# Altium PCB PCB.PcbDoc
Units mm, origin at the board's own origin, x right, y up, seen from the top; angles counter-clockwise.
Board outline 35 x 35 mm, 4 copper layers (Top Layer, GND, 3,3V, Bottom Layer), stack 0.685 mm thick; 59 components, 44 nets, 201 pads, 244 vias.
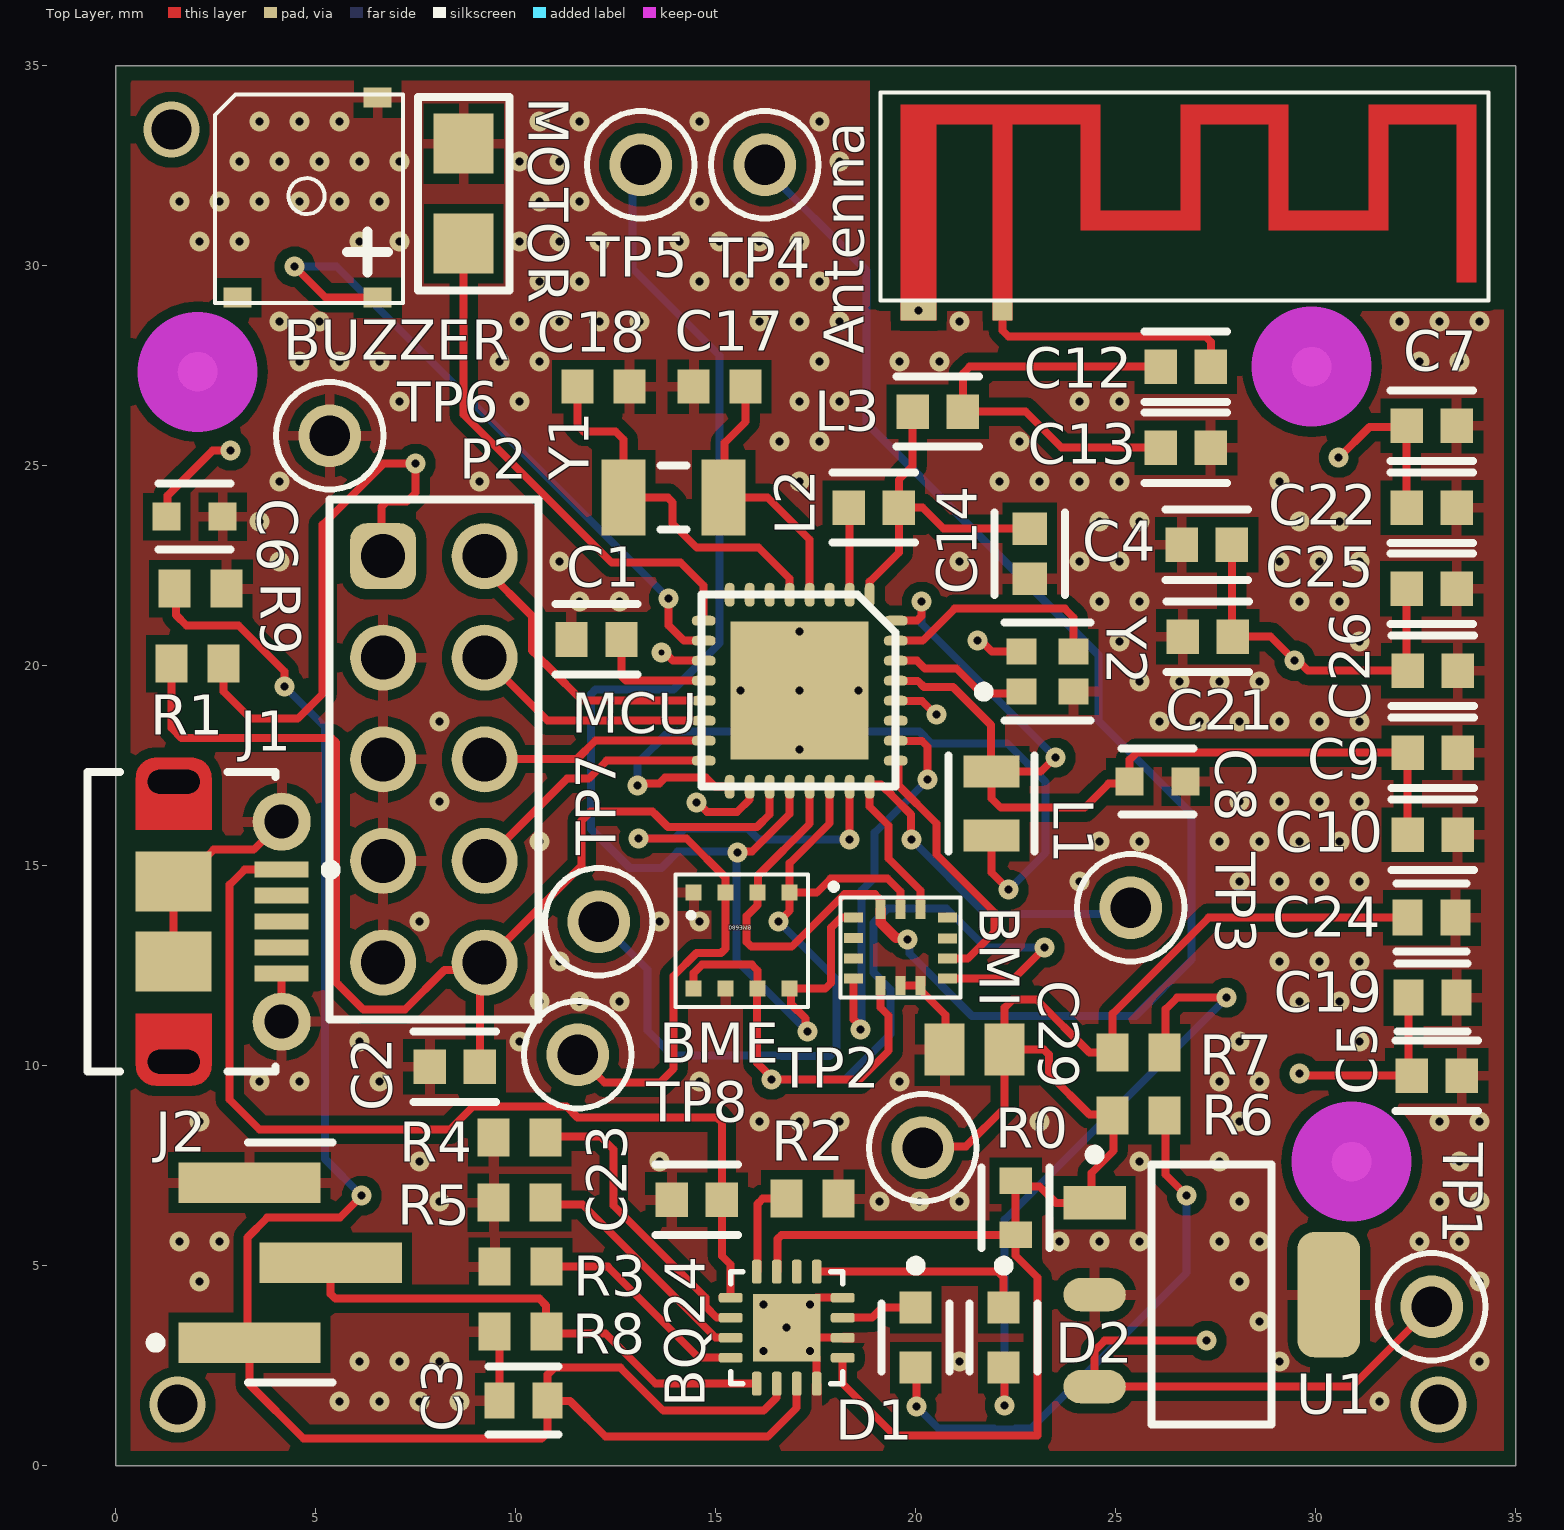
[diagram p0: Top Layer view]
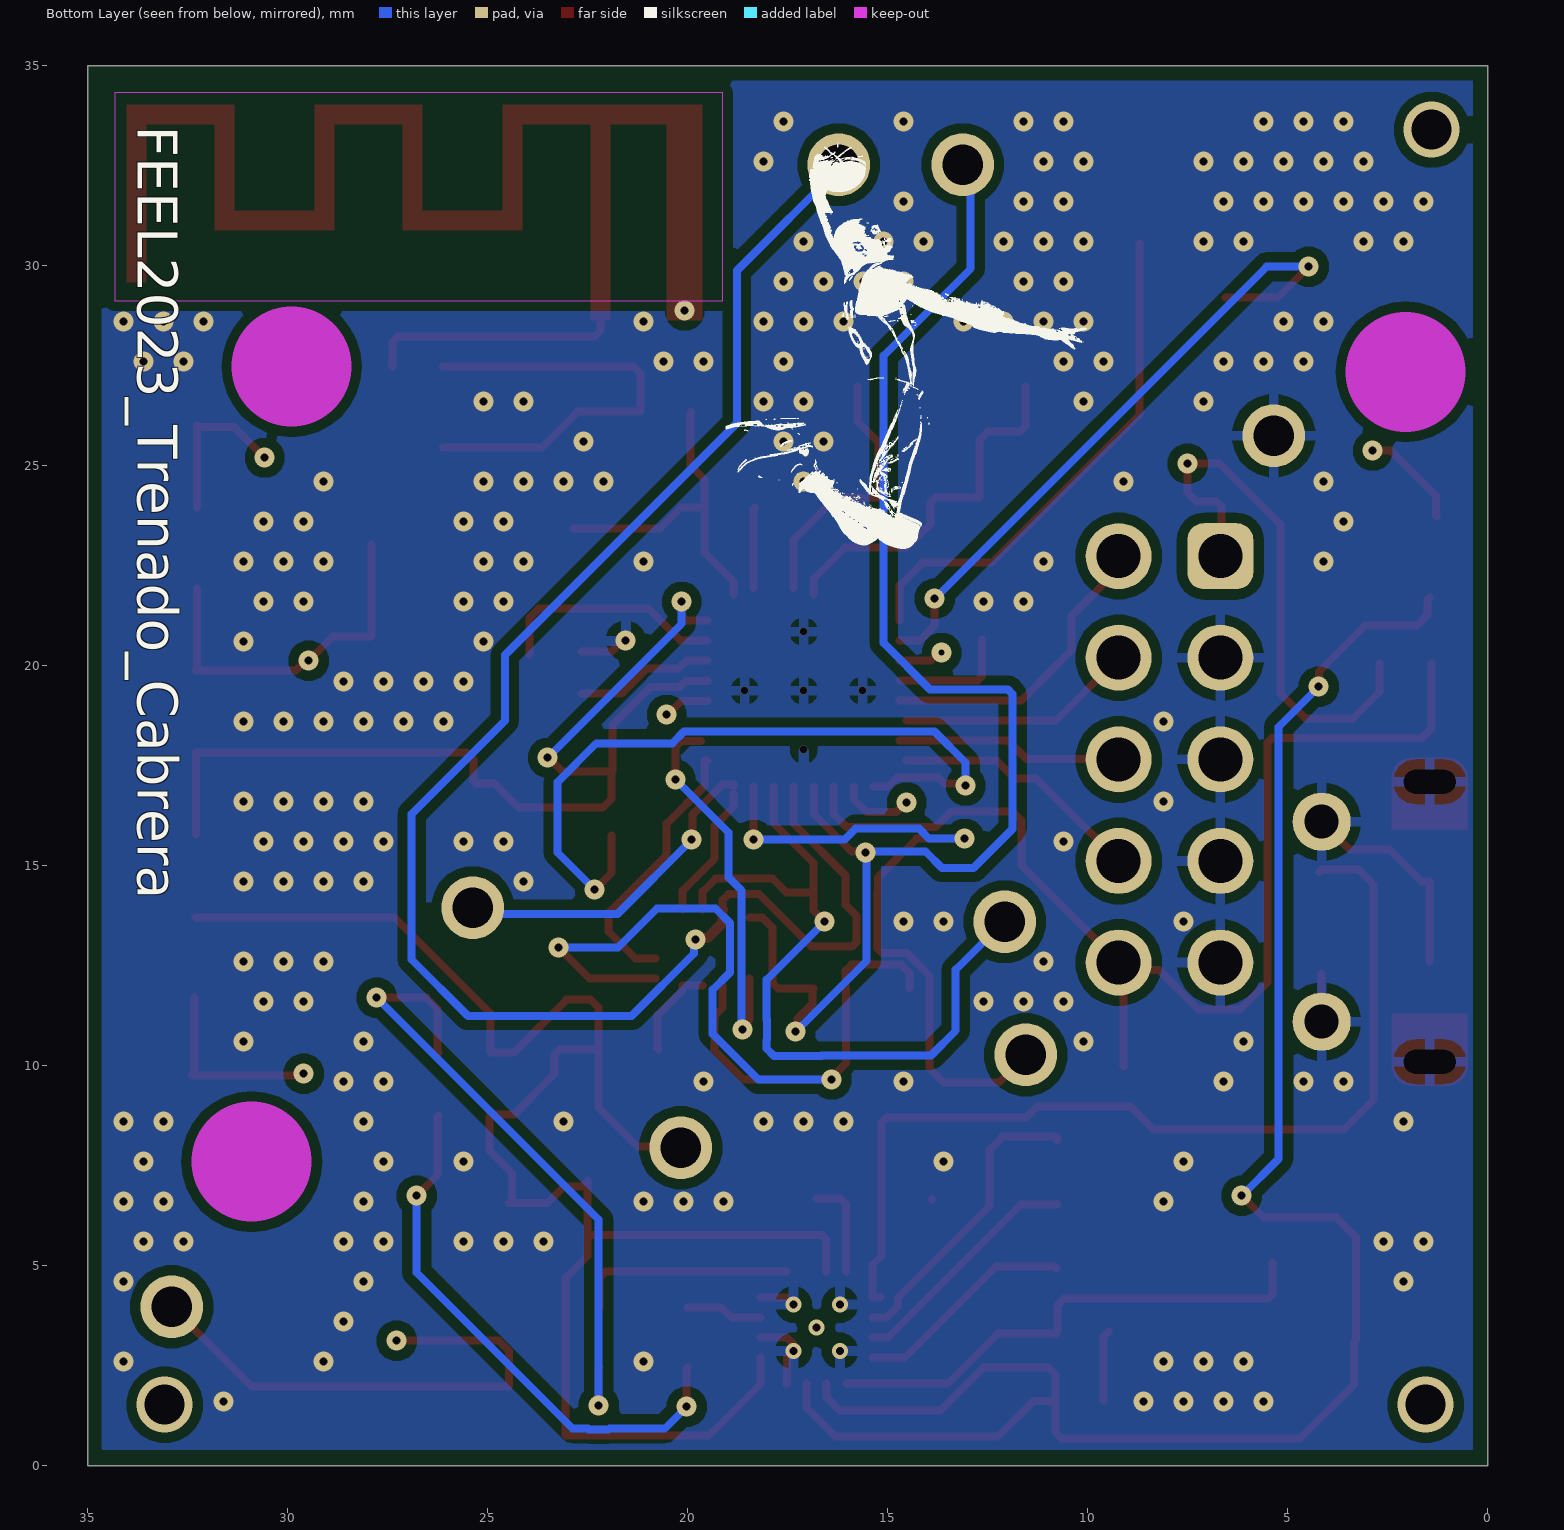
[diagram p1: Bottom Layer view, seen from below]
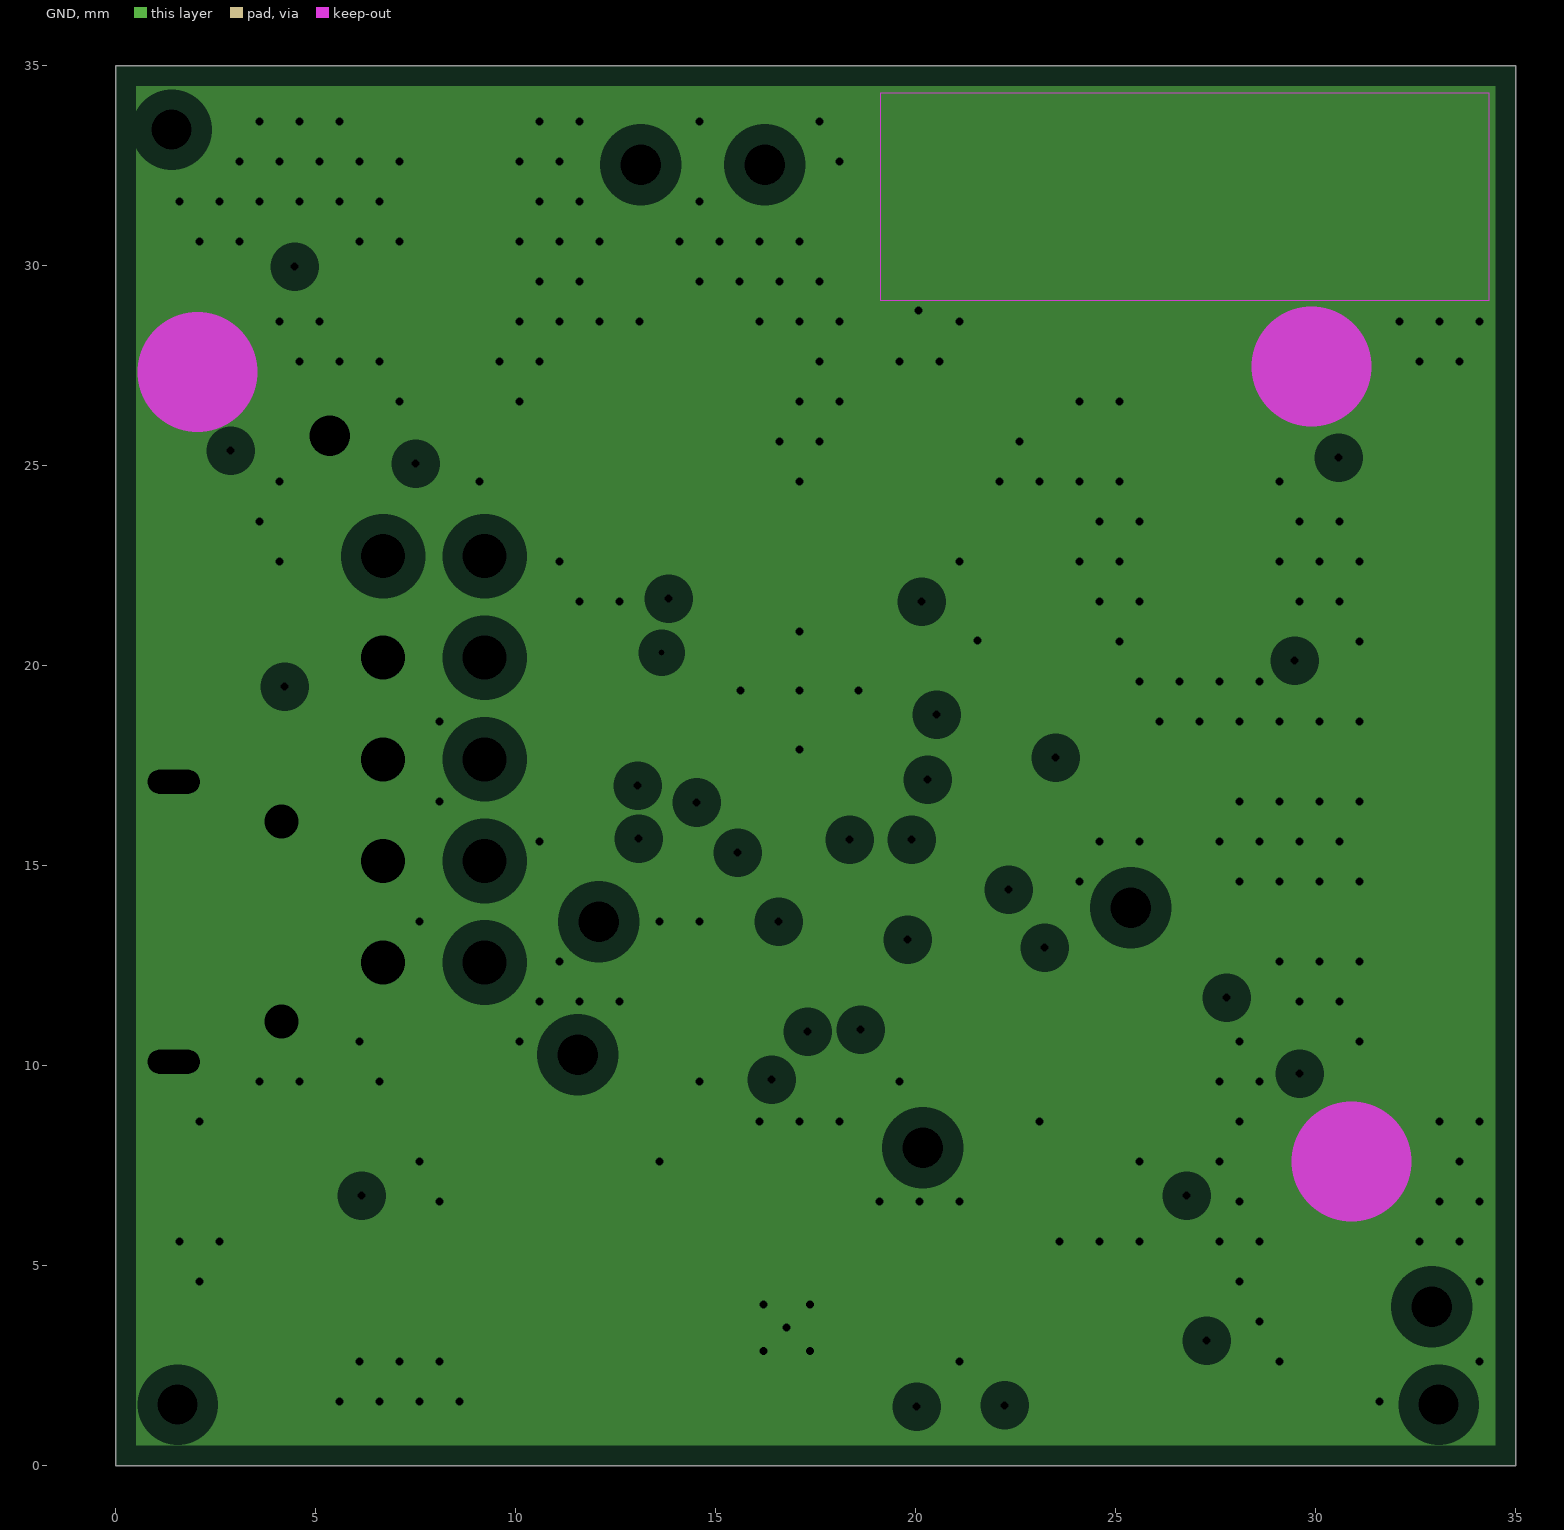
[diagram p2: GND, clearances drawn from the general rule]
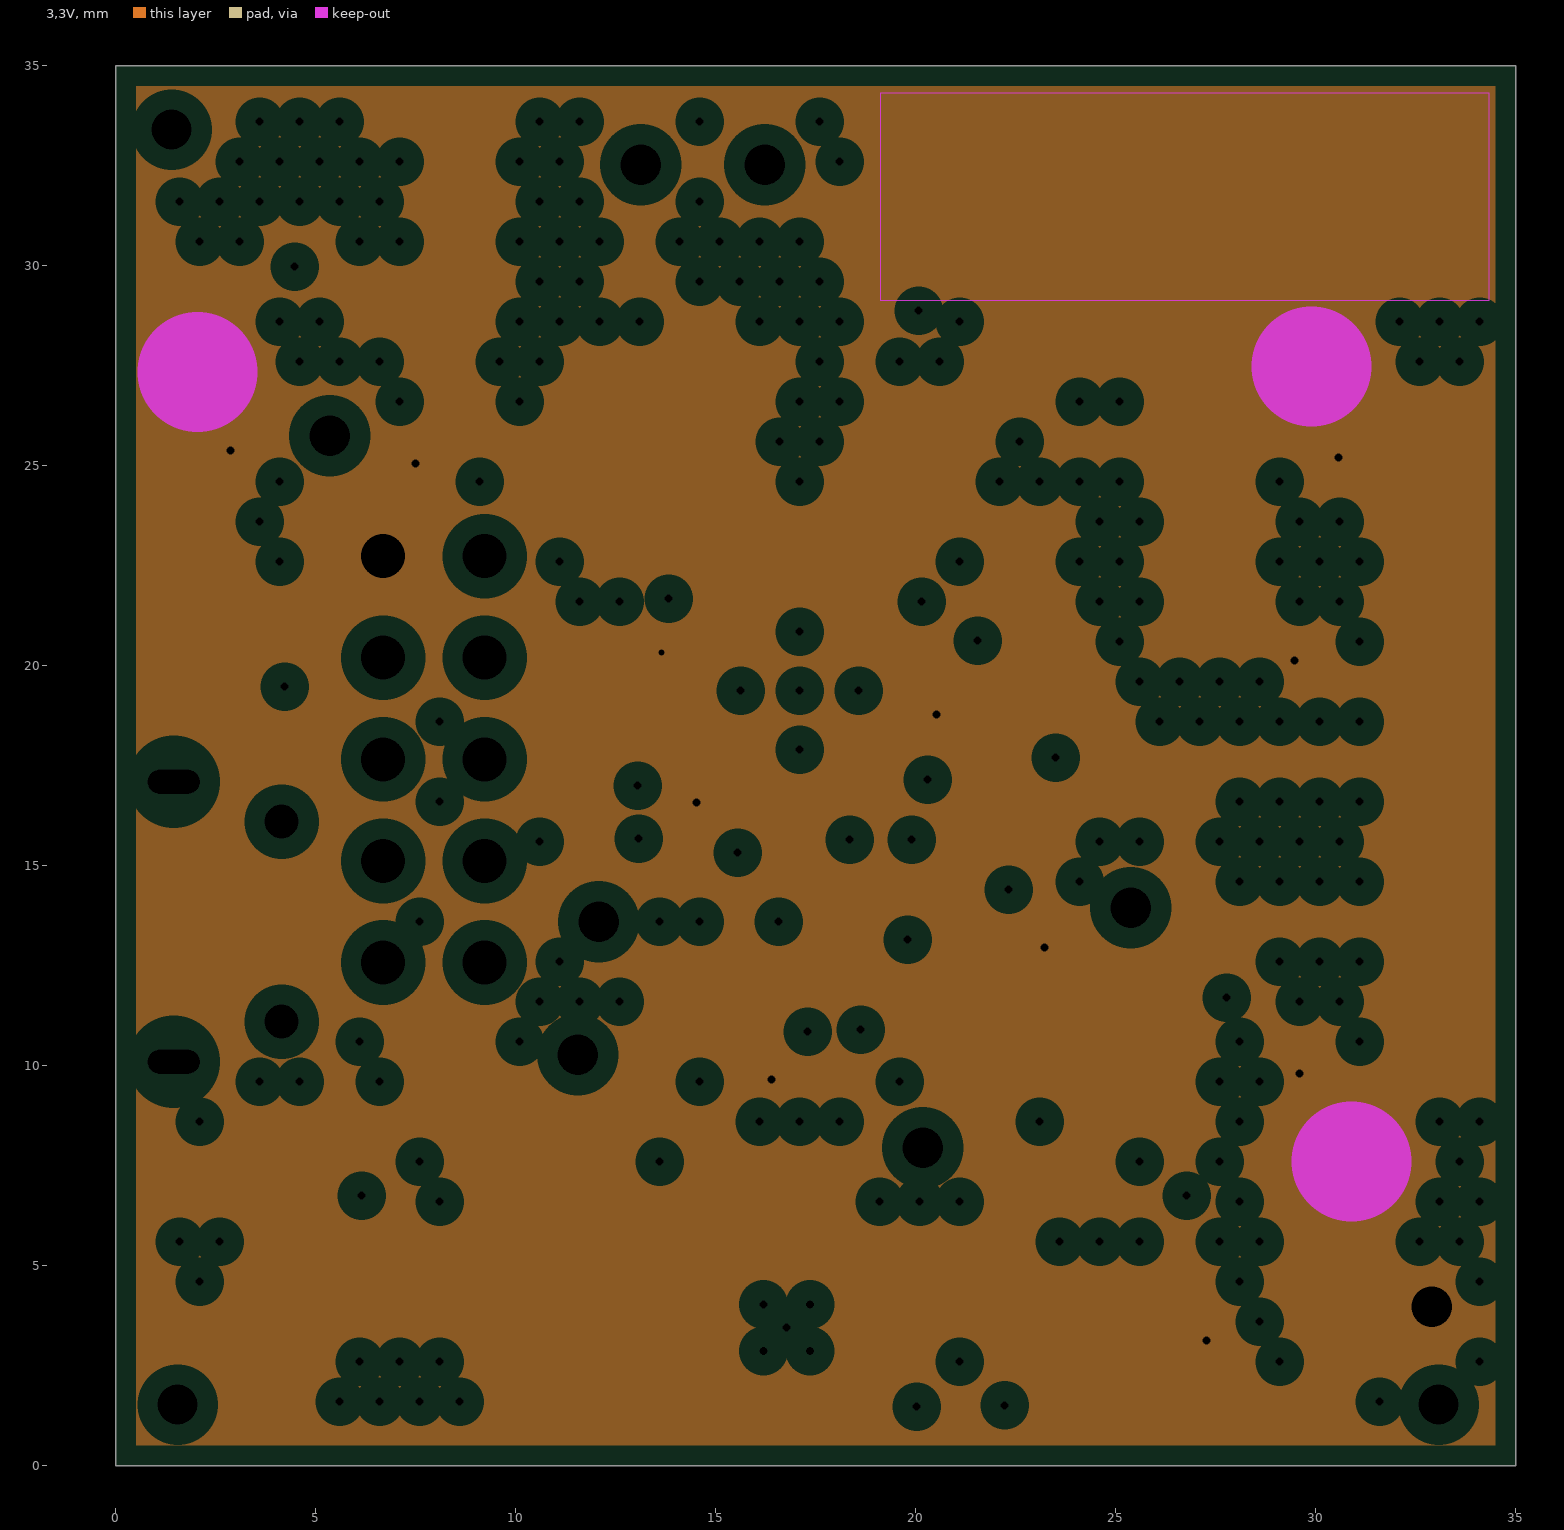
[diagram p3: 3,3V, clearances drawn from the general rule]
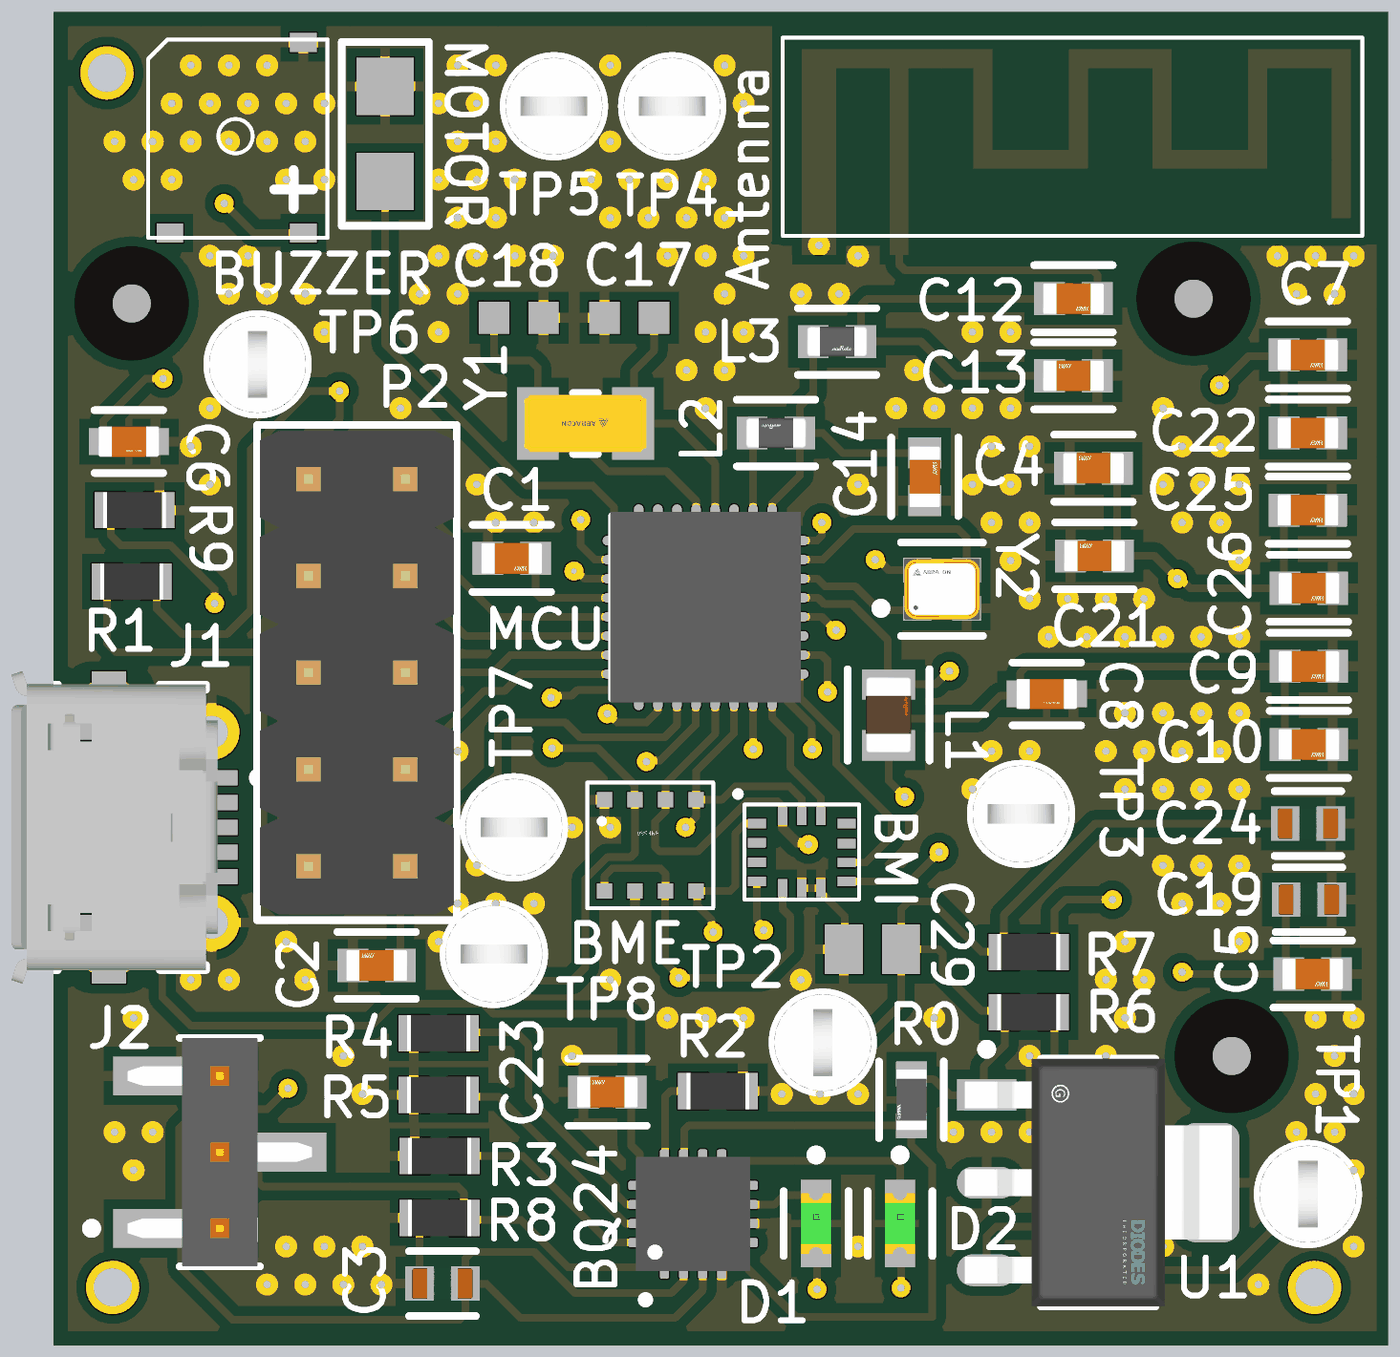
[diagram p4: 3D render of the assembled board from above, using the file's embedded part models]

## Layer stack, top to bottom
Top Solder: solder mask 0.0102, Solder Resist, Dk 3.5
Top Layer: signal copper 0.0356
Dielectric 2: prepreg 0.1118, PP-015, Dk 4.3
GND: plane copper 0.035, net CE
Dielectric 1: dielectric 0.32, FR-4, Dk 4.8
3,3V: plane copper 0.035, net 3.3V
Dielectric 5: prepreg 0.1118, PP-015, Dk 4.3
Bottom Layer: signal copper 0.0356
Bottom Solder: solder mask 0.0102, Solder Resist, Dk 3.5

## Board outline
0,0 0,35 35,35 35,0

## Design rules (kind name [scope] priority, off if disabled: settings)
AcuteAngle [All] p1: minimum=4.50000000000000E+0001 checktracksonly=FALSE
BoardOutlineClearance [All] p1: gap=0.3 ignorepadtopadclearanceinfootprint=FALSE
Clearance Clearance_1 [All] p1: gap=0.254 ignorepadtopadclearanceinfootprint=FALSE except(0: Arc-Hole Track-Hole SMDPad-Hole THPad-Hole Via-Hole Fill-Hole Poly-Hole Region-Hole Text-Hole; 0.09: Arc-Arc Arc-Track Track-Track; 0.127: SMDPad-SMDPad; 0.2: Arc-SMDPad Track-SMDPad; 0.5: Via-Via)
Clearance polygonrule [InNamedPolygon('GND_L01_P002')] p2: gap=0.254 ignorepadtopadclearanceinfootprint=FALSE except(0: Arc-Hole Track-Hole SMDPad-Hole THPad-Hole Via-Text Via-Hole Fill-Hole Poly-Hole Region-Hole Text-Hole)
HoleSize [All] p1: absolutevalues=TRUE maxlimit=6.3 minlimit=0.15 maxpercent=80.000 minpercent=20.000
MinimumAnnularRing [All] p1: minimumring=0.13
MinimumSolderMaskSliver [All] p1: minsoldermaskwidth=0.13
PlaneClearance [All] p1: clearance=0.508
PlaneConnect [All] p1: planeconnectstyle=Relief reliefexpansion=0.2 reliefentries=4 reliefconductorwidth=0.254 reliefairgap=0.254
PolygonConnect [All] p1: connectstyle=Relief reliefconductorwidth=0.254 reliefentries=4 polygonreliefangle="90 Angle" airgapwidth=0.254
RoomDefinition MCU [InComponentClass('MCU')] p1: confinementstyle=ConfineOut formatcopy=TRUE lockcomponents=FALSE outline 36.425,11.025 244.588,11.025 244.588,29.151 36.425,29.151
RoomDefinition Sensors [InComponentClass('Sensors')] p2: confinementstyle=ConfineOut formatcopy=TRUE lockcomponents=FALSE outline 31.003,47.024 64.104,47.024 64.104,53.249 31.003,53.249
RoomDefinition "Power Supply" [InComponentClass('Power Supply')] p3: confinementstyle=ConfineOut formatcopy=TRUE lockcomponents=FALSE outline 36.825,30.603 175.035,30.603 175.035,45.253 36.825,45.253
RoomDefinition Actuators [InComponentClass('Actuators')] p4: confinementstyle=ConfineOut formatcopy=TRUE lockcomponents=FALSE outline 37.8,1.426 68.03,1.426 68.03,9.952 37.8,9.952
RoutingVias [All] p1: holewidth=0.2 width=0.5 viastyle="Through Hole" minholewidth=0.15 minwidth=0.25 maxholewidth=0.7 maxwidth=0.8
SilkToSilkClearance SilkToSilkClearance_1 [IsText] p1: silktosilkclearance=0.254
SilkToSolderMaskClearance [IsText vs IsPad] p1: minsilkscreentomaskgap=0.08 clearancetoexposedcopper=FALSE
SilkToSolderMaskClearance SilkToSolderMaskClearance_1 [IsText vs SolderMaskExpansion] p2: minsilkscreentomaskgap=0 clearancetoexposedcopper=FALSE
SolderMaskExpansion [All] p1: expansion=0.038 istentingtop=FALSE soldermaskfromhole=TRUE
UnRoutedNet [IsNetTieComponent] p1:
Width [All] p1: maxlimit=0.6 minlimit=0.09 preferedwidth=0.2 minimp=50.000000 maximp=50.000000 favimp=50.000000
23 further rules are at their usual default settings.

## Classes and differential pairs
component class Sensors: BME BMI C21 C22 C25 C26
component class "Power Supply": BQ24 C3 C19 C23 C24 C29 D1 D2 J1 J2 R2 R3 R4 R5 R6 R7 R8 R9 TP1 TP2 TP6 U1
component class MCU: Antenna C1 C2 C4 C5 C6 C7 C8 C9 C10 C12 C13 C14 C17 C18 L1 L2 L3 MCU P2 R1 TP3 TP4 TP5 TP7 TP8 Y1 Y2
component class Actuators: BUZZER MOTOR

## Components (designator, comment, footprint, x,y, rotation, side; value= is the part's Value field where it differs from the comment)
Antenna "-" PCBANTENNA 19.625,28.625 r0 top locked net-tie
BME "BME680_Sen_4in1" BME_LGA8 15.65,13.125 r90 top locked
BMI "BMI323" BMI323 18.45,13.7 r0 top locked
BQ24 "BQ24232" VQFN 16.775,3.45 r90 top locked
BUZZER "Surface_Mount_Buzzer" buzzer 6.55,29.2 r90 top
C1 "1 µF" FP-0603-L_1_6_0_15-W_0_81-IPC_C 12.017,20.659 r0 top
C2 "100 nF" FP-0603-L_1_6_0_15-W_0_81-IPC_C 8.475,9.975 r180 top
C3 "4.7 µF" FP-C0603-CG-MFG 10.2,1.625 r180 top value=4.7uF
C4 "100 nF" FP-0603-L_1_6_0_15-W_0_81-IPC_C 27.275,23.025 r180 top
C5 "100 nF" FP-0603-L_1_6_0_15-W_0_81-IPC_C 33.024,9.75 r0 top
C6 "10 µF" FP-0603-L_1_6_0_2-W_0_8_0-MFG 1.975,23.725 r0 top
C7 "100 nF" FP-0603-L_1_6_0_15-W_0_81-IPC_C 32.9,26 r0 top
C8 "10 µF" FP-0603-L_1_6_0_2-W_0_8_0-MFG 26.05,17.1 r0 top
C9 "100 nF" FP-0603-L_1_6_0_15-W_0_81-IPC_C 32.925,17.825 r0 top
C10 "100 nF" FP-0603-L_1_6_0_15-W_0_81-IPC_C 32.925,15.775 r0 top
C12 "TBD" FP-0603-L_1_6_0_15-W_0_81-IPC_C 26.75,27.475 r0 top
C13 "TBD" FP-0603-L_1_6_0_15-W_0_81-IPC_C 26.749,25.45 r180 top
C14 "TBD" FP-0603-L_1_6_0_15-W_0_81-IPC_C 22.85,22.8 r90 top
C17 "12 pF" CAPC1608X73X35LL10T15 15.1,26.975 r0 top
C18 "12 pF" CAPC1608X73X35LL10T15 12.2,26.975 r180 top
C19 "4.7 µF" FP-C0603-CG-MFG 32.925,11.7 r0 top value=4.7uF
C21 "100 nF" FP-0603-L_1_6_0_15-W_0_81-IPC_C 27.3,20.725 r180 top
C22 "100 nF" FP-0603-L_1_6_0_15-W_0_81-IPC_C 32.9,23.95 r0 top
C23 "1 µF" FP-0603-L_1_6_0_15-W_0_81-IPC_C 14.525,6.65 r180 top
C24 "4.7 µF" FP-C0603-CG-MFG 32.9,13.7 r0 top value=4.7uF
C25 "100 nF" FP-0603-L_1_6_0_15-W_0_81-IPC_C 32.9,21.925 r0 top
C26 "100 nF" FP-0603-L_1_6_0_15-W_0_81-IPC_C 32.925,19.875 r0 top
C29 "1 µF" CAPC2013X135X45LL10T25 21.475,10.4 r0 top
D1 "" FP-LTST-C190GKT-MFG 20,3.2 r270 top
D2 "" FP-LTST-C190GKT-MFG 22.2,3.2 r270 top
J1 "105017-0001" USB-MICRO-B_V 2.8,13.6 r270 top locked
J2 "TMM-103-01-L-S-SM" FP-TMM-103-01-L-S-SM-MFG 4.36,5.075 r90 top
L1 "10 µH" FP-DFE201210U-MFG 21.9,16.55 r90 top locked
L2 "TBD" FP-LQM18NN_00-IPC_C 18.95,23.95 r180 top
L3 "TBD" FP-LQM18NN_00-IPC_C 20.55,26.35 r0 top
MCU "CC2640R2FRHB" CC2640 18.85,21.775 r270 top
MOTOR "MOTOR" Motor 8.7,31.8 r90 top
P2 "61301021121" 61301021121 7.955,17.66 r270 top locked
R0 "Comment" FP-AC0603-IPC_C 22.5,6.45 r270 top
R1 "1K" RESC1609X50X30NL8T20 2.05,20.05 r0 top
R2 "3.2K" RESC1609X50X30NL8T20 17.425,6.675 r180 top
R3 "1.8K" RESC1609X50X30NL8T20 10.125,4.975 r0 top
R4 "18K" RESC1609X50X30NL8T20 10.1,8.2 r0 top
R5 "3.9K" RESC1609X50X30NL8T20 10.1,6.575 r0 top
R6 "1.5K" RESC1609X50X30NL8T20 25.575,8.75 r180 top
R7 "1.5K" RESC1609X50X30NL8T20 25.575,10.325 r180 top
R8 "1K" RESC1609X50X30NL8T20 10.125,3.35 r0 top
R9 "2M" RESC1609X50X30NL8T20 2.125,21.925 r180 top
TP1 "5002" FP-5002-MFG 32.9,3.975 r90 top
TP2 "5002" FP-5002-MFG 20.175,7.95 r90 top
TP3 "5002" FP-5002-MFG 25.375,13.95 r180 top
TP4 "5002" FP-5002-MFG 16.225,32.525 r180 top
TP5 "5002" FP-5002-MFG 13.125,32.525 r180 top
TP6 "5002" FP-5002-MFG 5.35,25.75 r90 top
TP7 "5002" FP-5002-MFG 12.075,13.6 r180 top
TP8 "5002" FP-5002-MFG 11.55,10.275 r180 top
U1 "AP7361-33E-13" FP-SOT223-IPC_C 27.399,4.275 r0 top locked
Y1 "32.768KHZ" FP-ABS07-MFG 13.95,24.2 r180 top locked
Y2 "24 MHZ" FP-ABM11-MFG 23.3,19.85 r0 top locked

## Footprints (in the part's own frame and the unit in brackets; to place one, negate y for a bottom-side part, rotate by r counter-clockwise, add the part's x,y. Pads: shape width x height; smd on the part's side, far side on the other; paste and mask are expansions set on the pad)
61301021121 [mm] "Pin Header, pitch 2.54 mm, THT, Vertical, dual row, 10p"
  rrect50% 1.65x1.65 hole 1.1: 1(-5.08,-1.27)
  round 1.65 hole 1.1: 2(-5.08,1.27) 3(-2.54,-1.27) 4(-2.54,1.27) 5(0,-1.27) 6(0,1.27) 7(2.54,-1.27) 8(2.54,1.27) 9(5.08,-1.27) 10(5.08,1.27)
  silkscreen extent -6.5,-2.62 6.5,2.62, body extent -6.35,-2.54 6.35,2.54, height 8.59
BME_LGA8 [mm] "LGA, 8-Leads, Body 3,00x3,00mmx0,93mm, Pitch 0,80mm"
  rect 0.4x0.4 smd: 1(1.2,1.2) 2(1.2,0.4) 3(1.2,-0.4) 4(1.2,-1.2) 5(-1.2,-1.2) 6(-1.2,-0.4) 7(-1.2,0.4) 8(-1.2,1.2)
  silkscreen extent -1.65,-1.65 1.65,1.65, body extent -1.7,-1.7 1.7,1.7, height 1.2
BMI323 [mm]
  rect 0.475x0.25 smd: 1(0,0) 2(0,-0.508) 3(0,-1.016) 4(0,-1.524) 8(2.35,-1.525) 9(2.35,-1.025) 10(2.35,-0.525) 11(2.35,0)
  rect 0.25x0.475 smd: 5(0.675,-1.7) 6(1.175,-1.7) 7(1.675,-1.7) 12(1.675,0.2) 13(1.175,0.2) 14(0.675,0.2)
  silkscreen extent -0.52,-2 2.68,0.8, body extent -0.33,-2 2.68,0.5, height 0.25
buzzer [mm]
  rect 0.5x0.7 smd: 1(0,0) 2(5,0) 3(0,3.5)
  silkscreen extent -0.13,-0.64 5.08,4.06, body extent -0.13,-0.64 5.08,4.06, height 2
CAPC1608X73X35LL10T15 [mm] "Chip Capacitor, 2-Leads, Body 1.60x0.81mm, IPC High Density"
  rect 0.8x0.85 smd: 1(-0.65,0) 2(0.65,0)
  body extent -0.85,-0.46 0.85,0.46, height 0.73
CAPC2013X135X45LL10T25 [mm] "Chip Capacitor, 2-Leads, Body 2.00x1.25mm, IPC High Density"
  rect 1x1.3 smd: 1(-0.75,0) 2(0.75,0)
  body extent -1.05,-0.67 1.05,0.68, height 1.35
CC2640 [mm]
  oval 0.6x0.25 smd: 1(0,0) 2(0,-0.5) 3(0,-1) 4(0,-1.5) 5(0,-2) 6(0,-2.5) 7(0,-3) 8(0,-3.5) 17(4.8,-3.5) 18(4.8,-3) 19(4.8,-2.5) 20(4.8,-2) 21(4.8,-1.5) 22(4.8,-1) 23(4.8,-0.5) 24(4.8,0)
  oval 0.25x0.6 smd: 9(0.65,-4.15) 10(1.15,-4.15) 11(1.65,-4.15) 12(2.15,-4.15) 13(2.65,-4.15) 14(3.15,-4.15) 15(3.65,-4.15) 16(4.15,-4.15) 25(4.15,0.65) 26(3.65,0.65) 27(3.15,0.65) 28(2.65,0.65) 29(2.15,0.65) 30(1.65,0.65) 31(1.15,0.65) 32(0.65,0.65)
  rect 3.45x3.45 smd: 33(2.4,-1.75)
  silkscreen extent 0,-4.2 4.8,0.65, body extent -0.1,-4.25 4.9,0.75, height 1
FP-0603-L_1_6_0_2-W_0_8_0-MFG [mm]
  rect 0.7x0.7 smd paste+0 mask+0: 1(-0.7,0) 2(0.7,0)
  silkscreen extent -0.9,-0.82 0.9,0.82, body extent -1.15,-0.6 1.15,0.6, height 0.25
FP-0603-L_1_6_0_15-W_0_81-IPC_C [mm]
  rect 0.807x0.868 smd paste+0 mask+0: 1(-0.626,0) 2(0.626,0)
  silkscreen extent -1.03,-0.88 1.03,0.88, body extent -1.13,-0.58 1.13,0.58, height 0.25
FP-5002-MFG [mm]
  round 1.57 hole 1.02 paste-1000 mask+0: 1(0,0)
  silkscreen extent -1.34,-1.35 1.34,1.35, body extent -1.45,-1.45 1.45,1.45, height 0.25
FP-ABM11-MFG [mm]
  rect 0.75x0.65 smd paste+0 mask+0: 1(-0.65,-0.5) 2(0.65,-0.5) 3(0.65,0.5) 4(-0.65,0.5)
  silkscreen extent -1.72,-1.22 1.07,1.22, body extent -1.17,-0.97 1.17,0.97, height 0.25
FP-ABS07-MFG [mm]
  rect 1.1x1.9 smd paste+0 mask+0: 1(-1.25,0) 2(1.25,0)
  silkscreen extent -0.33,-0.8 0.33,0.8, body extent -1.9,-1.05 1.9,1.05, height 0.25
FP-AC0603-IPC_C [mm]
  rect 0.659x0.812 smd paste+0 mask+0: 1(-0.677,0) 2(0.677,0)
  silkscreen extent -1.01,-0.85 1.01,0.85, body extent -1.11,-0.55 1.11,0.55, height 0.25
FP-C0603-CG-MFG [mm]
  rect 0.75x0.9 smd paste+0 mask+0: 1(-0.6,0) 2(0.6,0)
  silkscreen extent -0.87,-0.85 0.87,0.85, body extent -1.2,-0.6 1.2,0.6, height 0.25
FP-DFE201210U-MFG [mm]
  rect 0.8x1.4 smd paste+0 mask+0: 1(-0.8,0) 2(0.8,0)
  silkscreen extent -1.2,-1.07 1.2,1.07, body extent -1.3,-0.8 1.3,0.8, height 0.25
FP-LQM18NN_00-IPC_C [mm]
  rect 0.807x0.858 smd paste+0 mask+0: 1(-0.626,0) 2(0.626,0)
  silkscreen extent -1.03,-0.87 1.03,0.87, body extent -1.13,-0.58 1.13,0.58, height 0.25
FP-LTST-C190GKT-MFG [mm]
  rect 0.8x0.8 smd paste+0 mask+0: 1(-0.75,0) 2(0.75,0)
  silkscreen extent -1.92,-0.85 0.85,0.85, body extent -1.25,-0.55 1.25,0.55, height 0.25
FP-SOT223-IPC_C [mm]
  rect 1.56x0.832 smd paste+0 mask+0: 1(-2.926,2.3)
  rrect100% 1.56x0.832 smd paste+0 mask+0: 2(-2.926,0) 3(-2.926,-2.3)
  rrect53% 1.56x3.132 smd paste+0 mask+0: 4(2.926,0)
  silkscreen extent -3.05,-3.25 1.5,3.62, body extent -3.81,-3.35 3.81,3.35, height 0.25
FP-TMM-103-01-L-S-SM-MFG [mm]
  rect 1.02x3.56 smd paste+0 mask+0: 1(-2,1.015) 2(0,-1.015) 3(2,1.015)
  silkscreen extent -3,-1.05 3,3.49, body extent -3.1,-2.89 3.1,2.89, height 0.25
Motor [mm]
  rect 1.5x1.5 smd: 1(-1.25,0) "2 +"(1.25,0)
  silkscreen extent -2.41,-1.14 2.41,1.14
PCBANTENNA [mm]
  rect 0.5x0.5 smd paste-0.25 mask+0: 1(2.55,0.25)
  rect 0.9x0.5 smd paste-0.45 mask+0: 2(0.45,0.25)
  Top Layer region: 0,4.9 5,4.9 5,5.4 0,5.4
  Top Layer region: 4.5,2.26 5,2.26 5,4.953 4.5,4.953
  Top Layer region: 4.953,2.26 7.112,2.26 7.112,2.76 4.953,2.76
  Top Layer region: 7,2.26 7.5,2.26 7.5,4.953 7,4.953
  Top Layer region: 7,4.9 9.7,4.9 9.7,5.4 7,5.4
  Top Layer region: 9.2,2.26 9.7,2.26 9.7,4.953 9.2,4.953
  Top Layer region: 9.652,2.26 11.811,2.26 11.811,2.76 9.652,2.76
  Top Layer region: 11.7,2.26 12.2,2.26 12.2,4.953 11.7,4.953
  Top Layer region: 11.7,4.9 14.4,4.9 14.4,5.4 11.7,5.4
  Top Layer region: 13.9,0.96 14.4,0.96 14.4,4.953 13.9,4.953
  Top Layer region: 2.3,0 2.8,0 2.8,4.953 2.3,4.953
  Top Layer region: 0,0 0.9,0 0.9,4.953 0,4.953
  Keep-Out Layer region: -0.5,0.5 -0.5,5.7 14.7,5.7 14.7,0.5
  silkscreen extent -0.5,0.5 14.7,5.7
RESC1609X50X30NL8T20 [mm] "Chip Resistor, 2-Leads, Body 1.65x0.95mm, IPC Medium Density"
  rect 0.8x0.95 smd: 1(-0.65,0) 2(0.65,0)
  body extent -0.82,-0.48 0.82,0.48, height 0.5
USB-MICRO-B_V [mm] "USB, MICRO B, Body 7.491x4.695 mm, Pitch 0.65 mm"
  rect 0.4x1.35 smd: 1(-1.3,1.35) 2(-0.65,1.35) 3(0,1.35) 4(0.65,1.35) 5(1.3,1.35)
  round 1.45 hole 0.85: 6(-2.5,1.35) 7(2.5,1.35)
  rrect50% 0x0 hole 0.6 slot 1.3 at 90 deg: 8(-3.5,-1.35)
  rect 1.5x1.9 smd: 9(-1,-1.35) 10(1,-1.35)
  rrect50% 0x1 hole 0.6 slot 1.3 at 90 deg: 11(3.5,-1.35)
  Top Layer circle w0.5: c-3.6,-0.9 r0.25
  Top Layer circle w0.5: c3.6,-0.9 r0.25
  Top Layer circle w0.5: c-3.6,-1.8 r0.25
  Top Layer circle w0.5: c3.6,-1.8 r0.25
  Top Layer region: -3.6,-1.8 -3.6,-0.9 -4.1,-0.9 -4.1,-1.8
  Top Layer region: -2.3,-2.3 -2.3,-0.4 -3.6,-0.4 -3.6,-2.3
  Top Layer region: 2.3,-0.4 2.3,-2.3 3.6,-2.3 3.6,-0.4
  Top Layer region: 3.6,-0.9 3.6,-1.8 4.1,-1.8 4.1,-0.9
  silkscreen extent -3.75,-3.5 3.75,2.7, body extent -4.1,-3.9 4.1,1.5, height 2.67
VQFN [mm]
  rrect50% 0.6x0.24 smd: 1(-1.4,0.75) 2(-1.4,0.25) 3(-1.4,-0.25) 4(-1.4,-0.75) 9(1.4,-0.75) 10(1.4,-0.25) 11(1.4,0.25) 12(1.4,0.75)
  rrect50% 0.24x0.6 smd: 5(-0.75,-1.4) 6(-0.25,-1.4) 7(0.25,-1.4) 8(0.75,-1.4) 13(0.75,1.4) 14(0.25,1.4) 15(-0.25,1.4) 16(-0.75,1.4)
  rect 1.68x1.68 smd: 6(0,0)
  round 0.4 on Top Overlay: ""(-2.25,1.25)
  silkscreen extent -1.4,-1.4 1.4,1.4, body extent -1.5,-1.5 1.5,1.5, height 1

## Part data
Antenna: library part PCBAntenna, "GND pin has a via to a GND plane that is not included in the footprint, but has to be included in the final PCB layout design."
C1 C12 C13 C14 C23: library part CMP-2006-04569-2, "General Purpose Ceramic Capacitor, 0603, 1uF, +80/-20 %, Y5V, +22%/ –82%, 10V", Capacitance=1uF, Case Code=0603, Case Code (Metric)=1608, Dielectric=Y5V, Insulation Resistance=100GR, Max Operating Temperature=85°C, Min Operating Temperature=-30°C, Package Quantity=1, Tolerance=80%, Voltage=10V, Case Code (Imperial)=0603, Case/Package=0603, Construction=Flat, Contact Plating=Tin, Depth=0.81mm, Dissipation Factor=12.5%, Height=0.63mm, Lead Free="Lead Free", Length=1.6mm, Mount="Surface Mount", Number of Pins=2, Packaging="Tape and Reel", Radiation Hardening=No, REACH SVHC="No SVHC", RoHS Compliant=Yes, Series=-, Termination=SMD/SMT, Thickness=0.035inch, Voltage Rating=10V, Voltage Rating (DC)=10V, Width=0.032inch
C2 C4 C5 C7 C9 C10 C21 C22 C25 C26: library part CMP-2006-04386-2, "Automotive Ceramic Capacitor, 0603, 100nF, 10%, X7R, 15%, 50V", Capacitance=100nF, Case Code (Imperial)=0603, Case Code (Metric)=1608, Dielectric=X7R, Dielectric Material=Ceramic, Insulation Resistance=100GR, Max Operating Temperature=125°C, Min Operating Temperature=-55°C, Package Quantity=1, Ratings=AEC-Q200, Tolerance=10%, Voltage=50V, Case/Package=0603, Construction=Flat, Contact Plating=Tin, Depth=0.81mm, Dissipation Factor=2.5%, Height=0.9mm, Lead Free="Lead Free", Length=1.6mm, Mount="Surface Mount", Number of Pins=2, Packaging="Tape and Reel", Radiation Hardening=No, REACH SVHC="No SVHC", RoHS Compliant=Yes, Series=-, Termination=SMD/SMT, Thickness=0.035inch, Voltage Rating=50V, Voltage Rating (DC)=50V, Width=0.032inch
C3 C19 C24: library part CMP-2006-02256-2, "CAP CER 4.7UF 6.3V X5R 0603", Capacitance=4.7uF, Manufacturer=Kemet, Manufacturer Part Number=C0603C475K9PACTU, Package=C0603-CG, Temperature="-55°C to +85°C", Temperature Characteristic=X5R, Temperature Coefficient=15%, Temperature Range High=+85°C, Temperature Range Low=-55°C, Tolerance=10%, Voltage Rating=6.3V, Automotive=No, Category=Cap, ComponentLink2Description=Datasheet, ComponentLink2URL=https://content.kemet.com/datasheets/KEM_C1006_X5R_SMD.pdf, Device Class L1="Passive Components", Device Class L2=Capacitors, Device Class L3="Ceramic Capacitors", Digikey Description="CAP CER 4.7UF 6.3V X5R 0603", Height=0.9mm, Ipc Land Pattern Name=CAPC16080X80, Lead Free=Yes, Material=Ceramic, Mouser Description="Multilayer Ceramic Capacitors MLCC - SMD/SMT 6.3volts 4.7uF X5R 10%", Octopart=https://octopart.com/c0603c475k9pactu-kemet-104242, RoHS=TRUE
C6 C8: library part CMP-2000-06226-4, "Multilayer Ceramic Capacitor 10uF 16V X5R 20% SMD 0603 T/R", Capacitance=10uF, Case Code (Imperial)=0603, Case Code (Metric)=1608, Dielectric=X5R, Max Operating Temperature=85°C, Min Operating Temperature=-55°C, Package Quantity=1, Tolerance=20%, Voltage Rating=16V, Case/Package=0603, Construction=Flat, Halogen Free="Halogen Free", Height=0.8mm, Length=0.063inch, Mount="Surface Mount", Packaging="Tape and Reel", RoHS Compliant=Yes, Series=M, Termination=SMD/SMT, Thickness=0.031inch, Voltage Rating (DC)=16V, Width=0.031inch
C17 C18: library part CMP-2006-04614-1, Manufacturer="AVX Interconnect / Elco", Part Number=06035J120GBSTR
C29: library part CMP-1036-04761-2, Manufacturer=Murata, Part Number=GRM21BR71H105KA12L
D1 D2: library part CMP-22017-000005-2, "LED GREEN CLEAR CHIP SMD", Case Code (Imperial)=0603, Case Code (Metric)=1608, Color=Green, Forward Current=30mA, Forward Voltage=2.1V, Lens Color=Colorless, Max Operating Temperature=85°C, Min Operating Temperature=-55°C, Package Quantity=1, Power Dissipation=100mW, Reverse Voltage=5V, Test Current=10mA, Voltage=2V, Case/Package=0603, Depth=0.8mm, Dominant Wavelength=569nm, Height=0.8mm, Illumination Color=Green, Lead Free="Lead Free", Length=1.6mm, Lens Style=Clear, Lens Transparency=Clear, Luminous Intensity=6mcd, Mount="Surface Mount", Number of Elements=1, Number of LEDs=1, Number of Pins=2, Packaging="Tape and Reel", Power Rating=100mW, Radiation Hardening=No, Viewing Angle=130°, Wavelength=565nm, Width=0.8mm
J1: library part CMP-2000-05827-1, "Micro-USB B Receptacle, Right Angle, Bottom Mount, Surface Mount, with Solder Tabs, -30 to 85 degC, 5-Pin USB, RoHS, Tape and Reel", Manufacturer=Molex, Package Description="5-Leads USB, Micro B, Body 7.5 x 5 mm, Pitch 0.65 mm", Package Reference=MICRO-B, Package Version="Rev. F, 12/2012", Standard Package=1, Voltage - Max=30V, 3D Model=105017-0001.stp, Catalog Drawings=1050170001, Category=Connectors,Interconnects, Circuits=5, Connector Type=USB-microB, Datasheet URL=http://www.molex.com/elqNow/elqRedir.htm?ref=http://www.molex.com/webdocs/datasheets/pdf/en-us/1050170001_IO_CONNECTORS.pdf, Datasheet Version=03/2016, Family=USB,DVI,HDMIConnectors, Featured Product=Micro-USBConnectorsUSBConnectors, Features=Shielded,SolderRetention, Gender=Receptacle, Ingress Protection=-, Manufacturer URL=http://www.molex.com/, Mating Products=WM17145-ND-CABLEMICROUSBBTOSTDA1.0MWM17147-ND-CABLEMICROUSBBTOSTDA2.0MWM17146-ND-CABLEMICROUSBBTOSTDA1.5M, Mounting Technology=SurfaceMount, Mounting Type=BoardCutout,SurfaceMount,RightAngle, Number of Contacts=5, Online Catalog=Molex-MicroUSB, Other Names=WM1399DKR, Package URL=http://www.molex.com/pdm_docs/sd/1050170001_sd.pdf, Packaging=Digi-Reel®, PCN Assembly/Origin=ResinSupplier21/Oct/2015, RoHS Information=1050170001CertofCompliance, Series=-, Specifications=-
J2: library part CMP-02766-001735-1, "CONN HEADER SMD 3POS 2MM", Flammability Rating="UL94 V-0", Housing Color=Black, Max Current Rating=3.9A, Max Operating Temperature=125°C, Max Voltage Rating (AC)=500V, Min Operating Temperature=-55°C, Connector Type=Header, Contact Finish - Mating=GOLD, Contact Material=Bronze, Contact Plating=Gold, Contact Shape=Square, Contact Type="Male Pin", Depth=1.97mm, Fastening Type=Pull, Gender=Male, Housing Material=Polymer, Insulation Color=Black, Insulation Material=Polymer, Lead Free="Lead Free", Length=6mm, Number of Contacts=3, Number of Positions=3, Number of Rows=1, Orientation=Straight, Packaging=Bulk, Pitch=2mm, Radiation Hardening=No, REACH SVHC="No SVHC", RoHS Compliant=Yes, Series=TMM, Termination=Solder
L1: library part CMP-06042-016271-1, "FIXED IND 2.2UH 1.2A 228 MOHM", RoHS Compliant=Yes
L2 L3: library part CMP-06042-016946-1, "Multilayer Type Inductor for General Circuits, 0603 (1608), 180nH, 10%, 0.6Ω, 50mA", Case Code (Imperial)=0603, Case Code (Metric)=1608, Current Rating=50mA, DC Resistance (DCR)=600mR, Inductance=180nH, Inductance Tolerance=10%, Inductor Type=MONOLITHIC, Max Operating Temperature=85°C, Min Operating Temperature=-40°C, Package Quantity=4000, Self Resonant Frequency=165MHz, Test Frequency=25MHz, Case/Package=0603, Core Material=Ferrite, DC Current=50mA, Depth=0.95mm, Height=0.8mm, Height - Seated (Max)=0.035inch, Length=1.6mm, Max DC Current=50mA, Military Standard=Not, Mount="Surface Mount", Number of Pins=2, Packaging="Tape and Reel", Q Factor=15, REACH SVHC="No SVHC", RoHS Compliant=Yes, Series=LQM18N, Shielding=Shielded, Termination=SMD/SMT, Tolerance=10%, Width=0.031inch
P2: library part CMP-1502-01084-2, Color=Black, Contact Resistance=20mΩ, Current Rating=3A, Flammability Rating="UL94 V-0", Insulation Resistance=1GΩ, Max Operating Temperature=105°C, Min Operating Temperature=-40°C, Operating Supply Voltage=250V, Connector Type="Male Pin", Contact Gender=Male, Contact Material=Copper, Contact Mating Length=5.9944mm, Contact Plating=Gold, Gender=Male, Height=2.54mm, Housing Material=PBT, Insulation=Insulated, Lead Pitch=2.54mm, Length=12.7mm, Mount="Through Hole", NexarPartId=18818163, Number of Contacts=10, Number of Pins=10, Number of Positions=10, Number of Rows=2, Orientation=Vertical, Packaging=Bulk, Pitch=2.54mm, REACH SVHC=Unknown, RoHS=Compliant, Row Spacing=2.54mm, Termination="Through Hole", Voltage Rating=250V, Width=12.7mm
R1 R2 R3 R4 R5 R6 R7 R8 R9: library part CMP-2000-03816-5, "Chip Resistor, 0 Ohm, Jumper, 100 mW, -55 to 155 degC, 0603 (1608 Metric), RoHS, Tape and Reel", Manufacturer="Vishay Semiconductor", Max Operating Temperature="155 degC", Min Operating Temperature="-55 degC", Package Quantity=5000, Voltage Rating="75 V", ComponentLink1Description="Manufacturer URL", ComponentLink1URL=http://www.vishay.com/, ComponentLink2Description=Datasheet, ComponentLink2URL=http://www.vishay.com/docs/20035/dcrcwe3.pdf, DatasheetVersion=06/2012, Height="0.45 mm", Length="1.55 mm", Mount="Surface Mount", Mounting Technology="Surface Mount", PackageDescription="2-Pin Surface Mount Device, Body 1.575 x 0.85 mm", PackageReference=0603, Packaging="Tape and Reel", Pins=2, REACH SVHC=Unknown, RoHSCompliant=true
TP1 TP2 TP3 TP4 TP5 TP6 TP7 TP8: library part CMP-2000-05182-2, "PC TEST POINT MINIATURE WHITE", Color=White, Flammability Rating="UL94 V-0", Package Quantity=100, Body Material=Bronze, Contact Material=Bronze, Contact Plating=Silver, Hole Diameter=1.6mm, Housing Color=White, Inside Diameter=1.27mm, Insulation=Insulated, Lead Free="Lead Free", Length=7.62mm, Material=Nylon, Mount="Through Hole", Number of Ports=1, Orientation=Straight, Outside Diameter=2.54mm, Packaging=Bulk, Plating=Silver, REACH SVHC="No SVHC", RoHS Compliant=Yes, Series=THM
U1: library part CMP-12756-000024-1, "IC REG LINEAR 3.3V 1A SOT223", Case/Package=SOT-223, Dropout Voltage=500mV, Max Input Voltage=6V, Max Operating Temperature=85°C, Max Output Current=1A, Max Power Dissipation=1.1W, Min Current Limit=1.1A, Min Input Voltage=2.2V, Min Operating Temperature=-40°C, Output Voltage=3.3V, Package Quantity=1, Power Dissipation=1.1kW, Power Supply Rejection Ratio (PSRR)=65dB, Quiescent Current=70uA, Reference Voltage=800mV, Accuracy=1%, Contact Plating=Tin, Lead Free="Lead Free", Mount="Surface Mount", Number of Outputs=1, Number of Pins=4, Number of Regulators=1, Output Current=1A, Output Type=Fixed, Packaging="Tape and Reel", Polarity=Positive, Radiation Hardening=No, REACH SVHC="No SVHC", Weight=0.000282oz
Y1: library part CMP-0447-00001-4, "Crystal 32.768kHz ±20ppm (Tol) 12.5pF FUND 70kΩ 2-Pin CSMD T/R", Case/Package=CSMD, ESR (Equivalent Series Resistance)=70kR, Frequency=32.768kHz, Frequency Tolerance=20ppm, Load Capacitance=12.5pF, Max Operating Temperature=85°C, Min Operating Temperature=-40°C, Operating Frequency="32.768 kHz", Package Quantity=3000, Depth=1.5mm, Height=0.9mm, Lead Free="Lead Free", Length=3.2mm, Number of Pins=2, Packaging="Tape and Reel", Radiation Hardening=No, REACH SVHC="No SVHC", RoHS Compliant=Yes, Series=ABS07, Series Resistance=70kR, Termination=SMD/SMT, Tolerance=20ppm, Width=1.5mm
Y2: library part CMP-27762-002563-1, "Crystal 24MHz ±20ppm 10pF SMD-4 2mm x 1.6mm", Case/Package=CSMD, ESR (Equivalent Series Resistance)=100R, Frequency=24MHz, Frequency Stability=20ppm, Load Capacitance=10pF, Max Operating Temperature=85°C, Min Operating Temperature=-40°C, Package Quantity=3000, Depth=1.6mm, Frequency Tolerance=20ppm, Height=0.023inch, Length=2mm, Mount="Surface Mount", Number of Pins=4, Packaging="Tape and Reel", REACH SVHC="No SVHC", RoHS Compliant=Yes, Series=ABM11, Series Resistance=100R, Termination=SMD/SMT, Tolerance=20ppm, Width=1.6mm
BMI BQ24 BUZZER MOTOR: Company="ETSI Telecomunicaciones"

## Free pads (board coordinates)
  round 1 smd mask+1: 8(2.05,27.35) 9(29.9,27.475) 10(30.9,7.6)

## Via types
v1: diameter 0.5, hole 0.2, Top Layer to Bottom Layer, 230 vias
v2: diameter 0.2, hole 0.2, Top Layer to Bottom Layer, 5 vias
v3: diameter 0.4, hole 0.2, Top Layer to Bottom Layer, 5 vias
v4: diameter 1.4, hole 1, Top Layer to Bottom Layer, 3 vias
v5: diameter 0.5, hole 0.15, Top Layer to Bottom Layer, 1 vias

## Nets (pads, with @x,y where several pads share a name; then routed paths per layer and width w, separated by ;. In a path a pad name is that pad's centre, name@x,y a point inside that pad or via, vN(x,y) a via of type N, cw(c..) or ccw(c..) an arc to the next point about the centre after c; other vN are vias at no path point)
3.3V: BME.6 BME.8 BMI.5 BMI.8 C4.1 C5.1 C6.1 C7.1 C19.1 C21.1 C22.1 C25.1 C26.1 MCU.11 MCU.18 MCU.28 P2.1 R1.2 TP1.1 U1.3 | length 75.5
  Top Layer w0.2: C6.1 1.299,23.749 1.299,24.258 2.416,25.375 v1(2.875,25.375) ; R1.2 2.7,19.35 3.375,18.675 4.55,18.675 5.175,19.3 5.175,23.525 6.7,25.05 v1(7.5,25.05) 7.5,24.325 7.275,24.1 6.775,24.1 6.65,23.975 6.65,22.775 P2.1 P2.1@6.685,22.767 ; v5(13.65,20.325) 13.731,20.325 13.931,20.125 MCU.11 ; BME.8 14.45,12.315 14.66,12.525 15.901,12.525 16.05,12.376 BME.6 16.037,11.913 16.037,10.065 16.4,9.703 v1(16.4,9.65) 18.6,9.65 19.325,10.375 19.325,11.25 19.125,11.45 BMI.5 ; v1(14.525,16.581) 14.551,16.581 14.784,16.348 15.537,16.348 15.848,16.659 15.848,16.973 MCU.18 ; MCU.28 19.502,19.123 20.151,19.123 20.499,18.775 v1(20.525,18.775) ; BMI.8 22.45,12.175 v1(23.225,12.95) ; v1(27.275,3.125) 24.725,3.125 24.473,2.873 U1.3 30.9,1.975 TP1.1 ; C4.1 27.901,20.75 C21.1 28.875,20.725 v1(29.475,20.125) ; v1@29.556,20.125 29.806,19.875 C26.1 32.274,19.9 C25.1 ; v1(29.6,9.8) 29.65,9.75 C5.1@32.325,9.75 ; v1(30.575,25.2) 31.344,25.969 32.243,25.969 C7.1 C22.1 ; C19.1 32.325,9.823 C5.1
  Bottom Layer w0.2: v1(16.4,9.65) 18.229,9.65 19.375,10.796 19.375,11.9 18.946,12.329 18.946,13.571 19.3,13.925 20.774,13.925 21.749,12.95 v1(23.225,12.95)
4.4V: BQ24.5 BQ24.11 C24.1 C29.2 R0.1 R0.2 R6.2 R7.2 TP2.1 U1.1 | length 45.5
  Top Layer w0.2: BQ24.11 16.545,4.87 16.545,5.67 16.648,5.773 R0.2 ; BQ24.5 18.175,2.05 19.475,0.75 23.05,0.75 23.05,4.7 22.5,5.25 R0.2 ; TP2.1 20.21,7.985 21.26,7.985 22.225,8.95 C29.2 ; C24.1 27.325,13.7 24.925,11.3 R7.2 24.917,10.333 24.342,10.333 23.025,11.65 22.425,11.65 22.225,11.45 C29.2 ; C29.2 23.209,10.4 23.326,10.283 23.326,9.799 24.342,8.783 24.892,8.783 R6.2 24.95,8.725 24.95,7.875 24.4,7.325 24.4,6.648 U1.1 24.463,6.565 23.51,6.565 23.089,6.986 22.641,6.986 R0.1 R0.2
BAT1: BQ24.2 BQ24.3 C3.1 J2.1 R9.2 | length 48.4
  Top Layer w0.2: R9.2@1.452,21.7 1.508,21.644 1.508,21.267 1.775,21 3.075,21 4.224,19.851 4.224,19.476 v1(4.225,19.475) ; v1(6.15,6.75) 5.601,6.201 3.787,6.201 3.295,5.709 3.295,3.125 J2.1 3.345,2.03 4.7,0.675 10.65,0.675 10.8,0.825 C3.1 ; BQ24.2 16.525,1.703 16.197,1.375 13.689,1.375 12.614,2.45 10.975,2.45 10.8,2.275 C3.1 ; BQ24.3 17.025,1.45 16.3,0.725 12.25,0.725 11.358,1.617 10.808,1.617 C3.1
  Bottom Layer w0.2: v1(4.225,19.475) 5.226,18.474 5.226,16.55 5.229,16.547 5.229,7.671 v1(6.15,6.75)
CHG: BQ24.9 D2.1 | length 5.5
  Top Layer w0.2: BQ24.9 22.051,4.85 22.2,4.701 D2.1
CSB: BMI.12 MCU.24 TP3.1 | length 11.8
  Top Layer w0.2: MCU.24@18.85,16.802 18.85,16.475 19.325,16 19.325,15.175 20.125,14.375 BMI.12 ; MCU.24 18.85,17.025 19.133,17.025 19.22,16.945 19.375,16.79 19.882,16.282 19.882,15.668 v1(19.9,15.65)
  Bottom Layer w0.2: v1(19.9,15.65) 21.754,13.796 25.221,13.796 TP3.1
CSB2: BME.2 MCU.23 TP8.1 | length 18.1
  Top Layer w0.2: TP8.1@11.375,10.425 12.225,9.575 13.6,9.575 13.95,9.925 13.95,12.249 14.516,12.815 15.133,12.815 15.25,12.932 BME.2 15.242,14.333 15.242,14.708 14.275,15.675 v1(13.075,15.675) ; v1(18.35,15.65) MCU.23
  Bottom Layer w0.2: v1(13.075,15.675) 13.965,15.675 14.219,15.929 15.8,15.929 16.079,15.65 v1(18.35,15.65)
DCDC_SW: L1.1 MCU.17 | length 18.7
  Top Layer w0.2: v1(13.05,17) 13.107,17.057 13.589,17.057 13.731,17.2 14.76,17.2 14.985,16.975 MCU.17 ; L1.1 21.9,14.825 v1(22.325,14.4)
  Bottom Layer w0.2: v1(13.05,17) 13.05,17.575 13.829,18.354 20.092,18.354 20.386,18.06 22.286,18.06 23.25,17.096 23.25,15.325 v1(22.325,14.4)
DIO_0: MCU.6
DIO_1: MCU.7
DIO_2: MCU.8
DIO_14: MCU.27
GND: "MOTOR.2 +" Antenna.2 BME.1 BME.7 BMI.6 BMI.7 BQ24.4 BQ24.6 BQ24.8 BUZZER.2 C1.1 C2.2 C3.2 C4.2 C5.2 C6.2 C7.2 C8.2 C9.2 C10.2 C13.1 C14.1 C17.1 C18.1 C19.2 C21.2 C22.2 C23.2 C24.2 C25.2 C26.2 C29.1 J1.5 J1.6 J1.7 J1.8 J1.9 J1.10 J1.11 J2.3 MCU.33 P2.3 P2.5 P2.7 P2.9 R2.1 R3.1 R4.1 R5.1 R8.1 R9.1 TP6.1 U1.2 U1.4 Y2.2 Y2.4 | length 14.8
  Top Layer w0.2: J1.10 J1.9 1.65,14.6 2.45,15.4 3.45,15.4 J1.6 J1.6@4.125,16.075 ; J1.7 J1.5 ; R8.1 9.6,3.225 C3.2 ; v3(17.355,4.03) 17.525,4.2 BQ24.8 ; BQ24.4 17.515,2.06 17.515,2.71 v3(17.355,2.87) 17.355,3.04 17.515,3.2 BQ24.6@18.175,3.2 ; BMI.6 BMI.7 20.125,11.888 20.75,11.263 20.75,10.425 C29.1 ; v1(21.55,20.625) 21.631,20.625 21.906,20.35 Y2.4
  other v1: 5.6,1.6 6.6,1.6 7.6,1.6 8.6,1.6 31.6,1.6 6.1,2.6 7.1,2.6 8.1,2.6 21.1,2.6 29.1,2.6 34.1,2.6 28.6,3.6 2.1,4.6 28.1,4.6 34.1,4.6 1.6,5.6 2.6,5.6 23.6,5.6 24.6,5.6 25.6,5.6 27.6,5.6 28.6,5.6 32.6,5.6 33.6,5.6 8.1,6.6 19.1,6.6 20.1,6.6 21.1,6.6 28.1,6.6 33.1,6.6 34.1,6.6 7.6,7.6 13.6,7.6 25.6,7.6 27.6,7.6 33.6,7.6 2.1,8.6 16.1,8.6 17.1,8.6 18.1,8.6 23.1,8.6 28.1,8.6 33.1,8.6 34.1,8.6 3.6,9.6 4.6,9.6 6.6,9.6 14.6,9.6 19.6,9.6 27.6,9.6 28.6,9.6 6.1,10.6 10.1,10.6 28.1,10.6 31.1,10.6 10.6,11.6 11.6,11.6 12.6,11.6 29.6,11.6 30.6,11.6 11.1,12.6 29.1,12.6 30.1,12.6 31.1,12.6 7.6,13.6 13.6,13.6 14.6,13.6 24.1,14.6 28.1,14.6 29.1,14.6 30.1,14.6 31.1,14.6 10.6,15.6 24.6,15.6 25.6,15.6 27.6,15.6 28.6,15.6 29.6,15.6 30.6,15.6 8.1,16.6 28.1,16.6 29.1,16.6 30.1,16.6 31.1,16.6 8.1,18.6 26.1,18.6 27.1,18.6 28.1,18.6 29.1,18.6 30.1,18.6 31.1,18.6 25.6,19.6 26.6,19.6 27.6,19.6 28.6,19.6 25.1,20.6 31.1,20.6 11.6,21.6 12.6,21.6 24.6,21.6 25.6,21.6 29.6,21.6 30.6,21.6 4.1,22.6 11.1,22.6 21.1,22.6 24.1,22.6 25.1,22.6 29.1,22.6 30.1,22.6 31.1,22.6 3.6,23.6 24.6,23.6 25.6,23.6 29.6,23.6 30.6,23.6 4.1,24.6 9.1,24.6 17.1,24.6 22.1,24.6 23.1,24.6 24.1,24.6 25.1,24.6 29.1,24.6 16.6,25.6 17.6,25.6 22.6,25.6 7.1,26.6 10.1,26.6 17.1,26.6 18.1,26.6 24.1,26.6 25.1,26.6 4.6,27.6 5.6,27.6 6.6,27.6 9.6,27.6 10.6,27.6 17.6,27.6 19.6,27.6 20.6,27.6 32.6,27.6 33.6,27.6 4.1,28.6 5.1,28.6 10.1,28.6 11.1,28.6 12.1,28.6 13.1,28.6 16.1,28.6 17.1,28.6 18.1,28.6 21.1,28.6 32.1,28.6 33.1,28.6 34.1,28.6 20.075,28.875 10.6,29.6 11.6,29.6 14.6,29.6 15.6,29.6 16.6,29.6 17.6,29.6 2.1,30.6 3.1,30.6 6.1,30.6 7.1,30.6 10.1,30.6 11.1,30.6 12.1,30.6 14.1,30.6 15.1,30.6 16.1,30.6 17.1,30.6 1.6,31.6 2.6,31.6 3.6,31.6 4.6,31.6 5.6,31.6 6.6,31.6 10.6,31.6 11.6,31.6 14.6,31.6 3.1,32.6 4.1,32.6 5.1,32.6 6.1,32.6 7.1,32.6 10.1,32.6 11.1,32.6 18.1,32.6 3.6,33.6 4.6,33.6 5.6,33.6 10.6,33.6 11.6,33.6 14.6,33.6 17.6,33.6
  other v2: 17.1,17.9 15.625,19.375 17.1,19.375 18.575,19.375 17.1,20.85
  other v3: 16.195,2.87 16.775,3.45 16.195,4.03
ILIM: BQ24.12 R2.2 | length 2.5
  Top Layer w0.2: BQ24.12 16.045,4.87 16.045,6.545 16.175,6.675 R2.2
IN: BQ24.13 C23.1 J1.1 | length 24.6
  Top Layer w0.2: J1.1@4.207,14.843 J1.1 3.225,14.9 2.85,14.525 2.85,9.15 3.6,8.4 8.351,8.4 8.926,8.975 11.274,8.975 11.545,8.704 15.034,8.704 15.151,8.587 15.151,5.249 15.375,5.025 BQ24.13 15.195,4.2 BQ24.13@15.175,4.22
INT1: BMI.4 MCU.26 | length 9.8
  Top Layer w0.2: BMI.4 18.45,11.156 18.625,10.981 v1(18.625,10.9) ; MCU.26@19.673,18.123 20.151,18.123 20.3,17.974 v1(20.3,17.15)
  Bottom Layer w0.2: v1(18.625,10.9) 18.65,10.925 18.65,14.382 18.975,14.707 18.975,15.825 v1(20.3,17.15)
INT2: BMI.9 MCU.25 | length 6.8
  Top Layer w0.2: MCU.25 19.567,17.625 19.569,17.623 19.569,17.006 20.525,16.05 20.525,15.276 21.975,13.826 21.975,13.35 21.3,12.675 BMI.9
ISET: BQ24.16 R3.2 | length 5.6
  Top Layer w0.2: R3.2@10.775,4.925 10.825,4.975 12.301,4.975 14.576,2.7 BQ24.16
ITERM: BQ24.15 R5.2 | length 6
  Top Layer w0.2: R5.2@10.75,6.525 11.675,6.525 15,3.2 BQ24.15
JTAG_TCK: MCU.14 P2.4 | length 6
  Top Layer w0.2: P2.4 10.8,18.625 MCU.14@14.527,18.625
JTAG_TDI: MCU.16 P2.8 | length 6.3
  Top Layer w0.2: P2.8 11.28,17.175 11.825,17.175 12.275,17.625 MCU.16@14.527,17.625
JTAG_TDO: MCU.15 P2.6 | length 5.7
  Top Layer w0.2: P2.6 9.232,17.667 11.53,17.667 11.988,18.125 MCU.15
JTAG_TMS: MCU.13 P2.2 | length 7.7
  Top Layer w0.2: P2.2 9.225,22.425 10.404,21.246 10.404,20.384 10.55,20.238 10.854,19.934 11.663,19.125 MCU.13
MISO: BME.5 BMI.1 MCU.20 TP5.1 | length 36.2
  Top Layer w0.2: v1(15.55,15.325) 15.576,15.351 15.901,15.351 16.848,16.298 16.848,16.973 MCU.20 ; v1(17.3,10.85) 17.25,10.9 17.25,11.178 16.884,11.543 16.884,11.891 BME.5 17.737,11.925 17.886,12.074 17.886,13.452 18.133,13.7 BMI.1
  Bottom Layer w0.2: TP5.1@12.925,32.525 12.925,29.925 15.1,27.75 15.1,20.565 13.94,19.405 11.996,19.405 11.879,19.288 11.879,15.921 12.856,14.944 13.644,14.944 14.05,15.35 15.525,15.35 15.525,12.625 v1(17.3,10.85)
MOSI: BME.3 BMI.14 MCU.21 TP4.1 | length 42.9
  Top Layer w0.2: BME.3 16.05,14.017 15.775,13.742 15.775,13.092 15.892,12.975 16.9,12.975 18.215,14.29 18.976,14.29 19.125,14.141 BMI.14 ; BME.3@16.056,14.331 16.056,14.756 17.35,16.05 MCU.21
  Top Layer w0.254: BMI.14 BMI.14 19.127,13.573 19.503,13.197 19.753,13.197 v1(19.8,13.15)
  Bottom Layer w0.2: TP4.1@16.125,32.525 18.771,29.879 18.771,26.068 24.571,20.268 24.571,18.625 26.9,16.296 26.9,12.65 25.496,11.246 21.404,11.246 19.839,12.811 19.839,13.111 v1(19.8,13.15)
NetAntenna_1: Antenna.1 C12.2 | length 6.5
  Top Layer w0.2: Antenna.1 22.175,28.375 22.325,28.225 27.25,28.225 27.376,28.099 C12.2 C12.2@27.408,27.507
NetC1_2: C1.2 MCU.12 | length 3
  Top Layer w0.2: C1.2 12.643,19.742 12.76,19.625 MCU.12
NetC12_1: C12.1 C13.2 L3.2 | length 11.3
  Top Layer w0.2: C13.2 23.65,25.45 22.75,26.35 L3.2 21.176,27.301 21.35,27.475 C12.1
NetD1_2: D1.2 R6.1 | length 13.7
  Top Layer w0.2: D1.2 20.025,2.425 v1(20.025,1.475) ; R6.1 26.25,8.725 26.25,7.275 v1(26.775,6.75)
  Bottom Layer w0.2: v1(20.025,1.475) 20.575,0.925 21.957,0.925 21.975,0.907 22.475,0.907 22.493,0.925 22.875,0.925 26.775,4.825 v1(26.775,6.75)
NetD2_2: D2.2 R7.1 | length 16.2
  Top Layer w0.2: D2.2 22.225,2.425 v1(22.225,1.511) ; R7.1 26.25,10.35 26.25,11.414 26.536,11.7 v1(27.775,11.7)
  Bottom Layer w0.2: v1(22.225,1.511) 22.225,6.15 v1(27.775,11.7)
nRESET: C2.1 MCU.19 P2.10 R1.1 | length 29.1
  Top Layer w0.2: R1.1 1.4,18.442 1.646,18.196 5.389,18.196 5.506,18.079 5.506,12.092 5.565,12.033 6.197,11.401 7.226,11.401 8.22,12.395 P2.10@9.04,12.395 ; C2.1 9.101,12.456 11.65,15.005 11.65,16.125 11.875,16.35 13.423,16.35 13.481,16.291 13.808,15.965 16.029,15.965 16.35,16.286 MCU.19
PGOOD: BQ24.7 D1.1 | length 1.9
  Top Layer w0.2: BQ24.7 18.909,3.7 19.159,3.95 D1.1
PWM1: MCU.9 MOTOR.1 | length 12.9
  Top Layer w0.2: MOTOR.1 8.7,26.276 12.401,22.575 14.125,22.575 14.7,22 MCU.9
PWM2: BUZZER.1 MCU.10 | length 16.9
  Top Layer w0.2: v1(4.475,29.975) 5.25,29.2 BUZZER.1 ; v1(13.825,21.675) 13.825,21.004 14.204,20.626 MCU.10
  Bottom Layer w0.2: v1(4.475,29.975) 5.525,29.975 v1(13.825,21.675)
RFN: L2.2 MCU.2 | length 2
  Top Layer w0.2: L2.2 18.35,23.924 MCU.2@18.35,21.948
RFP: C14.2 L2.1 L3.1 MCU.1 | length 8.5
  Top Layer w0.2: MCU.1 18.85,22.1 19.576,22.826 L2.1 ; L3.1@19.924,26.324 L3.1 ; L3.1@19.925,26.323 19.925,24.998 19.576,24.649 L2.1 ; C14.2 20.699,23.426 20.175,23.95 L2.1
RX_TX: MCU.3
SCK: BME.4 BMI.13 MCU.22 TP7.1 | length 20
  Top Layer w0.2: v1(16.575,13.6) 16.85,13.875 BME.4 ; MCU.22 17.85,16.064 16.85,15.064 BME.4 ; BMI.13 19.625,14.35 19.3,14.675 17.875,14.675 17.525,14.325 BME.4
  Bottom Layer w0.2: TP7.1@11.7,13.875 TP7.1@11.869,13.706 ; TP7.1@12.075,13.325 TP7.1 12.1,13.6 13.3,12.4 13.3,10.875 13.921,10.254 16.65,10.254 16.658,10.246 17.846,10.246 18.025,10.425 18.025,10.646 18.021,10.65 18.021,11.15 18.025,11.154 18.025,12.15 v1(16.575,13.6)
TMR: BQ24.14 R4.2 | length 7.6
  Top Layer w0.2: R4.2 10.75,8.125 10.85,8.225 12.125,8.225 12.45,7.9 12.45,6.5 14.748,4.202 14.748,3.98 15.028,3.7 BQ24.14
TS: BQ24.1 J2.2 R8.2 | length 12.7
  Top Layer w0.2: J2.2 5.375,4.292 5.492,4.175 10.592,4.175 10.759,4.008 10.759,3.366 R8.2 ; R8.2@10.775,3.3 12.25,3.3 13.5,2.05 BQ24.1
VDDR: C8.1 C9.1 C10.1 L1.2 MCU.29 MCU.32 | length 26.2
  Top Layer w0.2: MCU.29 19.502,19.623 20.048,19.623 20.204,19.467 20.933,19.467 21.879,18.521 21.879,17.371 L1.2 ; MCU.32 20.029,21.125 20.146,21.242 20.146,21.596 v1(20.15,21.6) ; v1(23.5,17.7) 23.474,17.7 23.124,17.35 L1.2 ; C10.1 C9.1 25.525,17.825 25.35,17.65 C8.1 25.3,17.05 24.825,17.05 24.225,16.45 22.125,16.45 21.9,16.675 L1.2
  Bottom Layer w0.2: v1(20.15,21.6) 20.15,21.05 v1(23.5,17.7)
X24M_N: MCU.30 Y2.1 | length 3.5
  Top Layer w0.2: MCU.30 20.033,20.125 20.233,19.925 21.025,19.925 21.65,19.3 Y2.1@22.65,19.3
X24M_P: MCU.31 Y2.3 | length 5.8
  Top Layer w0.2: MCU.31 20.175,20.625 20.975,21.425 23.726,21.425 23.95,21.201 Y2.3@23.95,20.285
X32K_Q1: C17.2 MCU.4 Y1.1 | length 6.8
  Top Layer w0.2: C17.2 15.75,26.101 15.225,25.576 15.225,24.225 Y1.1 16.3,24.2 17.35,23.15 MCU.4@17.35,21.948
X32K_Q2: C18.2 MCU.5 Y1.2 | length 9.4
  Top Layer w0.2: C18.2 11.55,25.999 11.699,25.85 12.5,25.85 12.7,25.65 Y1.2 13.808,24.2 13.925,24.083 13.925,23.551 14.526,22.95 16.075,22.95 16.85,22.175 MCU.5
pads on no net: BMI.2 BMI.3 BMI.10 BMI.11 BQ24. BQ24.10 BUZZER.3 J1.2 J1.3 J1.4
copper on no net:
  other v4: 1.55,1.525 33.075,1.525 1.4,33.4

## Polygon pours and split planes (outlines as drawn)
GND on Bottom Layer "GND_L04_P001" (solid, remove dead copper, pour order 1): 0.375,34.625 0.375,0.4 34.675,0.4 34.65,0.425 34.65,34.625 0.4,34.625
GND on Top Layer "GND_L01_P000" (solid, remove dead copper, pour order 0): 0.325,34.625 0.375,34.575 0.375,0.375 34.925,0.375 34.925,28.9 18.85,28.9 18.8,28.95 18.85,29 18.85,34.625 0.35,34.625
3.3V on 3,3V (split plane): 34.49,0.51 0.51,0.51 0.51,34.49 34.49,34.49
GND on GND (split plane): 34.49,0.51 0.51,0.51 0.51,34.49 34.49,34.49

## Keep-outs
Keep-Out Layer:
  circle w3: c30.9,7.6 r0
  circle w3: c29.9,27.475 r0
  circle w3: c2.05,27.349 r0

## Silkscreen, mask and mechanical layers (free items; w line width, h text height)
Bottom Overlay:
  drawing of 257 lines, arcs and shapes, not listed
  text "FEEL2023_Trenado_Cabrera" at 33.75,33.5 h1 r90

## Text inside footprints (layer, text, board x,y; h text height)
BME: Top Overlay "BME680" at 15.894,13.496 h0.1 r180
J1: Mechanical 1 "PCB EDGE" at -0.1,20.8 h0.3 r270